# Altium PCB FABLAB_BOT_01.PcbDoc
Units mm, origin at the board's own origin, x right, y up, seen from the top; angles counter-clockwise.
Board outline 48 x 12 mm, 2 copper layers (Top Layer, Bottom Layer), stack 1.971 mm thick; 4 components, 4 nets, 20 pads, 0 vias.
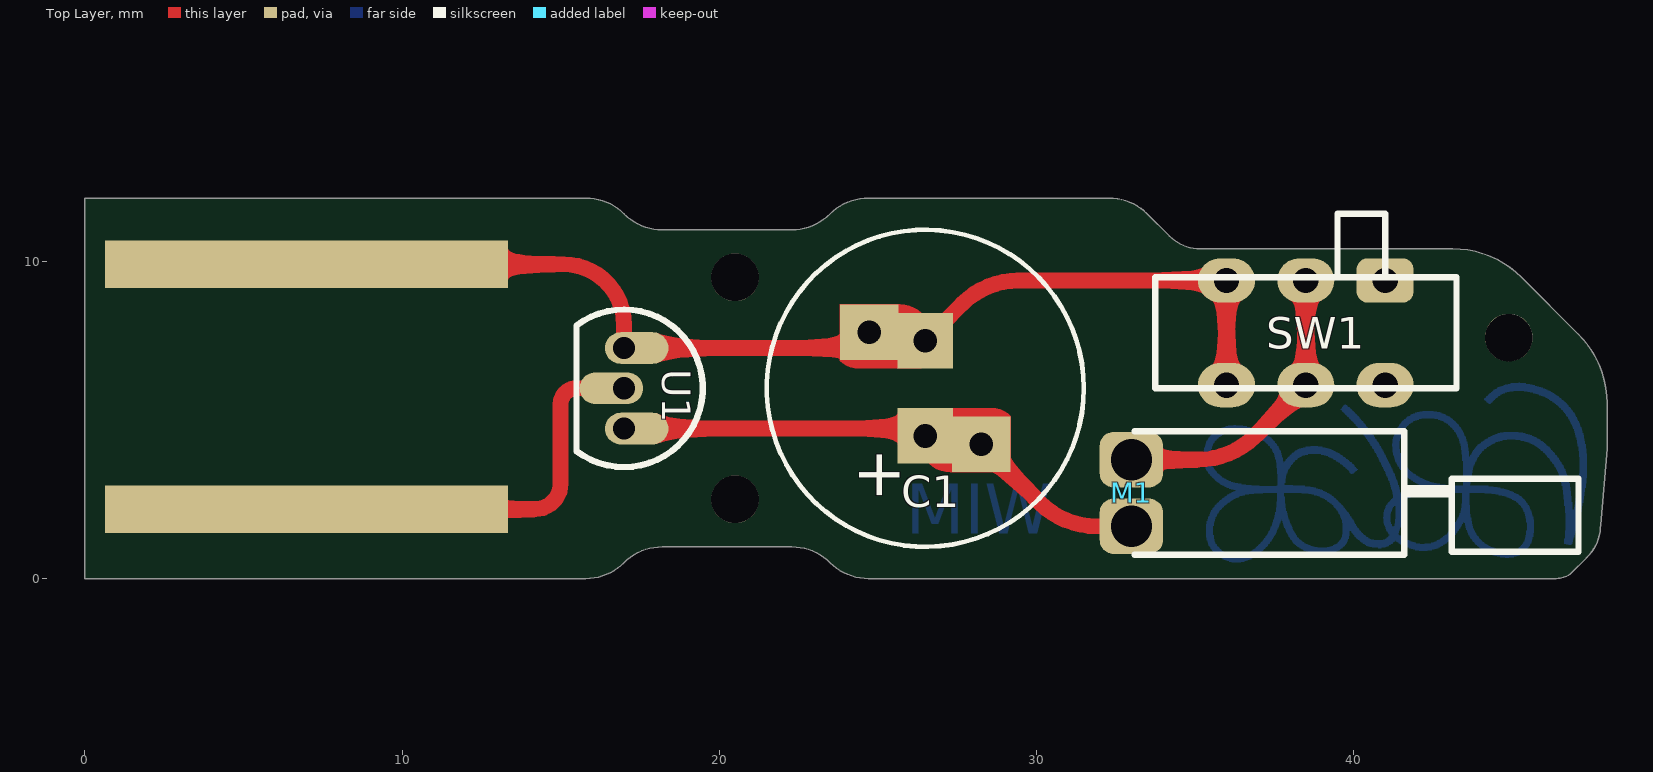
[diagram p0: Top Layer view]
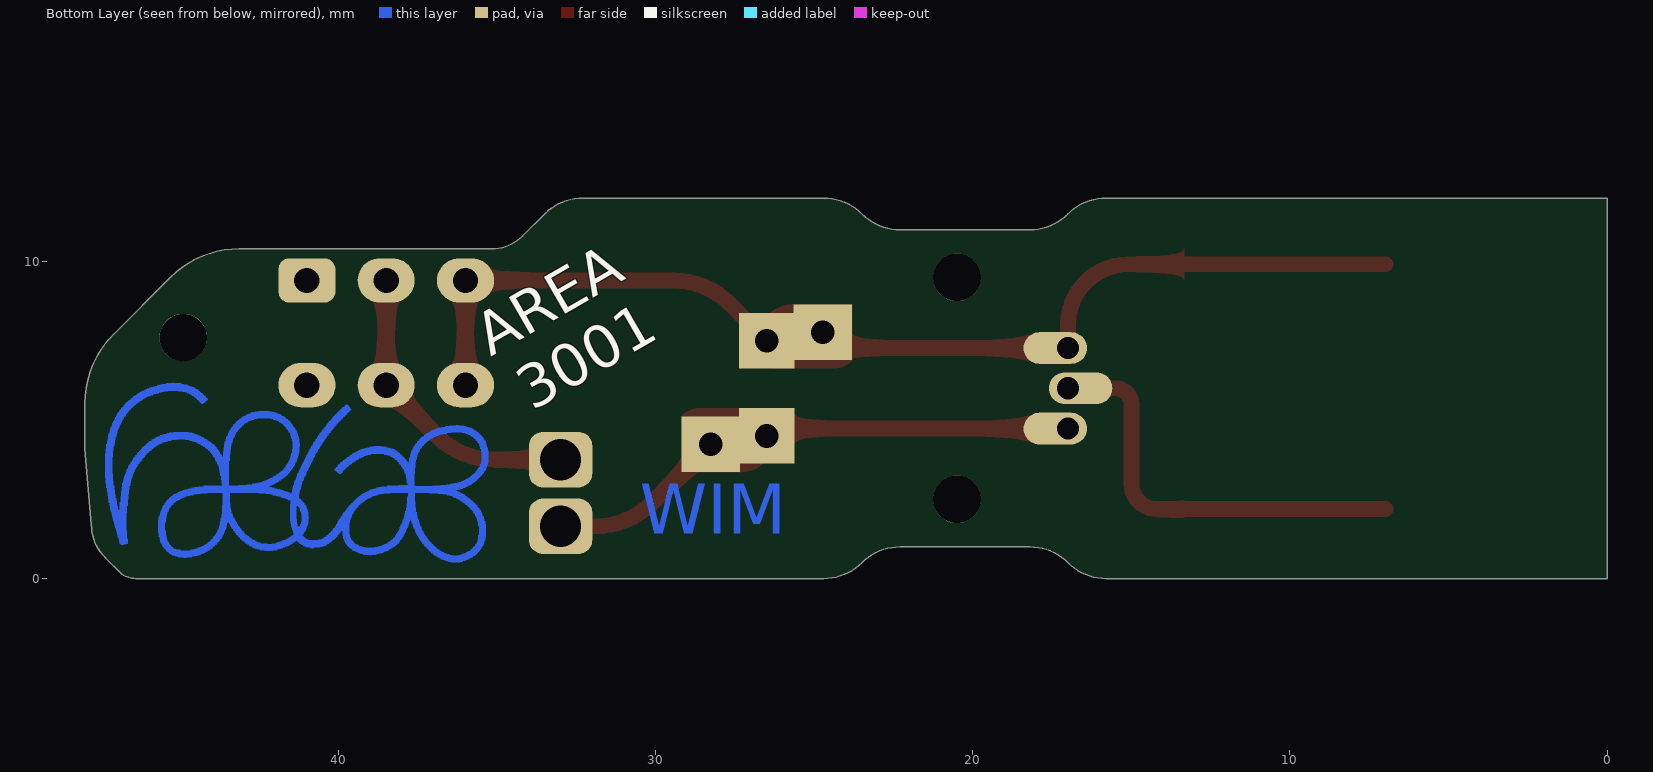
[diagram p1: Bottom Layer view, seen from below]

## Layer stack, top to bottom
Top Solder: solder mask 0.0102, Solder Resist, Dk 3.5
Top Layer: signal copper 0.0356
Dielectric1: dielectric 1.9, FR-4, Dk 4.8
Bottom Layer: signal copper 0.0356
Bottom Solder: solder mask 0.0102, Solder Resist, Dk 3.5

## Board outline
0,0 15.793,0 ccw(c15.793,1.707) 17,0.5 cw(c18.207,-0.707) 18.207,1 22.293,1 cw(c22.293,-0.707) 23.5,0.5 ccw(c24.707,1.707) 24.707,0 46.4,0 ccw(c46.4,0.724) 46.912,0.212 47.3,0.6 47.371,0.671 ccw(c46.341,1.7) 47.797,1.7 48,4.1 48,5.53 ccw(c44.934,5.53) 47.102,7.698 45.298,9.502 ccw(c43.13,7.334) 43.13,10.4 35.166,10.4 cw(c35.166,11.766) 34.2,10.8 33.495,11.505 ccw(c32.3,10.31) 32.3,12 24.707,12 ccw(c24.707,10.293) 23.5,11.5 cw(c22.293,12.707) 22.293,11 18.207,11 cw(c18.207,12.707) 17,11.5 ccw(c15.793,10.293) 15.793,12 0,12

## Design rules (kind name [scope] priority, off if disabled: settings)
Clearance [All] p1: gap=0.254
PolygonConnect [All] p1: connectstyle=Relief reliefconductorwidth=0.254 reliefentries=4 polygonreliefangle="90 Angle" airgapwidth=0.254
RoutingVias [All] p1: holewidth=0.711 width=1.27 viastyle="Through Hole" minholewidth=0.711 minwidth=1.27 maxholewidth=0.711 maxwidth=1.27
SilkToSolderMaskClearance SilkscreenOverComponentPads [IsPad] p1: minsilkscreentomaskgap=0.254 clearancetoexposedcopper=TRUE
SolderMaskExpansion [All] p1: expansion=0.102
Width [All] p1: maxlimit=10 minlimit=0.25 preferedwidth=0.5
29 further rules are at their usual default settings.

## Components (designator, comment, footprint, x,y, rotation, side; value= is the part's Value field where it differs from the comment)
C1 "CAP_POL" C_10x20mm 26.5,6 r90 top
M1 "Vibration Motor 3,9 x 8,5mm" VBR_3.9x8.5 33,2.7 r0 top
SW1 "mini Switch 2 pole double throw" MCLSS22P 38.5,7.75 r180 top
U1 "2,5V LDO" TO-92A 17,6 r180 top

## Footprints (in the part's own frame and the unit in brackets; to place one, negate y for a bottom-side part, rotate by r counter-clockwise, add the part's x,y. Pads: shape width x height; smd on the part's side, far side on the other; paste and mask are expansions set on the pad)
C_10x20mm [mm] "Capacitor, Electrolytic, Radial; Body 10 x 20mm; 5mm pitch"
  rect 1.75x1.75 hole 0.75: 1(-1.5,0) 2(1.5,0)
  silkscreen extent -5,-5 5,5, body extent -5,-5 5,5, height 20
MCLSS22P [mm] "SWITCH, DPDT, 0.1A, 12VDC, THT"
  rrect50% 1.8x1.4 hole 0.8: 1(-2.5,-1.65)
  oval 1.8x1.4 hole 0.8: 2(-2.5,1.65) 3(0,-1.65) 4(0,1.65) 5(2.5,-1.65) 6(2.5,1.65)
  silkscreen extent -4.75,-3.75 4.75,1.75, body extent -4.75,-3.7 4.75,1.75, height 3.5
TO-92A [mm] "TO, Flat Index; 3 In-Line, Axial Leads; Body Dia. 4.5mm; Leads 0.51 x 0.48 mm (max)"
  oval 2x1 hole 0.7 copper offset -0.4,0: 1(0,-1.27) 3(0,1.27)
  oval 2x1 hole 0.7 copper offset 0.4,0: 2(0,0)
  silkscreen extent -2.48,-2.48 1.5,2.48, body extent -2.61,-2.61 1.59,2.61, height 10
VBR_3.9x8.5 [mm] "Vibration motor 3.9 x 8.5 total length 14mm"
  rrect50% 2x1.75 hole 1.3: 1(0,-1.05) 2(0,1.05)
  silkscreen extent 0.1,-1.95 14.1,1.95, body extent 0.1,-1.95 14.1,1.95, height 3.9

## Part data
C1: library part "CAP 2V7 5F 10mm", "Capacitor electrolyt"
M1: library part "Vibration Motor 3.9x8.5", "=Description"
SW1: library part "SW 2P2T micro"
U1: library part "LDO 2V5 TO-92 MCP1700-25", "=Designator"

## Free pads (board coordinates)
  rect 12.7x1.5 smd: 0(6.985,2.19) 0(6.985,9.91)
  round 1.5 hole 1.5 unplated: 0(20.5,2.5) 0(20.5,9.5) 0(44.9,7.6)
  rect 1.85x1.75 hole 0.75: 1(24.732,7.768)
  rect 1.845x1.75 hole 0.75: 1(28.268,4.232)

## Nets (pads, with @x,y where several pads share a name; then routed paths per layer and width w, separated by ;. In a path a pad name is that pad's centre, name@x,y a point inside that pad or via, vN(x,y) a via of type N, cw(c..) or ccw(c..) an arc to the next point about the centre after c; other vN are vias at no path point)
2V6: C1.1 M1.1 pad.1@28.268,4.232 U1.3 | length 17.2
  Top Layer w0.5: U1.3 27.77,4.73 28.268,4.232 30.106,2.394 ccw(c31.902,4.19) 31.902,1.65 M1.1
GND: C1.2 pad.0@6.985,9.91 pad.1@24.732,7.768 SW1.5 SW1.6 U1.1 | length 33.9
  Top Layer w0.5: pad.0@6.985,9.91 15.09,9.91 cw(c15.09,8) 17,8 U1.1 C1.2@26.27,7.27 ; C1.2@27.014,8.014 27.656,8.656 cw(c29.452,6.86) 29.452,9.4 ; 29.4,9.4 SW1.5 SW1.6
NetM1_2: M1.2 SW1.3 SW1.4 | length 9.7
  Top Layer w0.5: M1.2 35.098,3.75 ccw(c35.098,6.29) 36.894,4.494 SW1.4 SW1.3
VUSB: pad.0@6.985,2.19 U1.2 | length 13.3
  Top Layer w0.5: pad.0@6.985,2.19 14.19,2.19 ccw(c14.19,3) 15,3 15,5.5 cw(c15.5,5.5) 15.5,6 U1.2
pads on no net: SW1.1 SW1.2

## Keep-outs
Keep-Out Layer:
  text ".Layer_Name" at 305.5,-28 h3.5

## Other copper
Top Layer:
  region net 2V6: 29.2,3.35 27.289,3.35 cw(c27.289,4.289) 26.625,3.625 26.625,5.375 28.596,5.375 cw(c28.596,4.521) 29.2,5.125
  region net GND: 23.8,8.65 25.711,8.65 cw(c25.711,7.711) 26.375,8.375 26.375,6.625 24.404,6.625 cw(c24.404,7.479) 23.8,6.875
  text ".Layer_Name" at 305.5,-28 h3.5
Bottom Layer:
  region: 3789 vertices and 7 holes, not listed, extent 35.282,0.515 47.363,6.172
  text "WIM" at 30.5,0.9 h2.7
  text ".Layer_Name" at 305.5,-28 h3.5

## Silkscreen, mask and mechanical layers (free items; w line width, h text height)
Top Overlay:
  text ".Layer_Name" at 305.5,-28 h3.5
Bottom Overlay:
  text "AREA" at 34.975,6.6 h2.3 r330
  text "3001" at 33.675,4.9 h2.3 r330
  text ".Layer_Name" at 305.5,-28 h3.5
Top Paste:
  text ".Layer_Name" at 305.5,-28 h3.5
Bottom Paste:
  text ".Layer_Name" at 305.5,-28 h3.5
Top Solder:
  rectangle: 0,0 13.5,12
  text ".Layer_Name" at 305.5,-28 h3.5
Bottom Solder:
  drawing of 4 lines, arcs and shapes, not listed
  text "WIM" at 30.5,0.9 h2.7
  text ".Layer_Name" at 305.5,-28 h3.5
Drill Guide:
  text ".Layer_Name" at 305.5,-28 h3.5
3D Symbols:
  text ".Layer_Name" at 305.5,-28 h3.5
Outline:
  the board outline again, w0.2
Comments:
  text ".Layer_Name" at 305.5,-28 h3.5
Fabrication:
  text "Total board thickness is 2.0mm" at -0.1,-6.7 h1.52
  text ".Layer_Name" at 305.5,-28 h3.5
Placebound Top:
  text ".Layer_Name" at 305.5,-28 h3.5
Placebound Bottom:
  text ".Layer_Name" at 305.5,-28 h3.5
Frame:
  drawing of 15 lines, arcs and shapes, not listed
  text "Document" at 301,-13 h2
  text ".PCB_TITLE" at 302.5,-18.5 h4
  text "Layer Name" at 301,-23 h2
  text "Date" at 301,-33 h2
  text "Rev" at 341,-33 h2
  text ".Print_Date" at 304,-38.5 h3.5
  text ".PCB_REV" at 345.5,-38.5 h4
  text "Desginer" at 251,-43 h2
  text "Document" at 301,-43 h2
  text ".Pcb_File_Name_No_Path" at 302.5,-48 h1.5
  text ".PCB_ENGINEER" at 255.5,-48.5 h4
Assembly Top:
  text ".Layer_Name" at 305.5,-28 h3.5
Assembly Bottom:
  text ".Layer_Name" at 305.5,-28 h3.5
Drill Drawing:
  text ".legend" at 192,0 h4

## Dimensions
0,12 to 0,0 on Fabrication
0,0 to 48,0.6 on Fabrication

## Text inside footprints (layer, text, board x,y; h text height)
C1: Assembly Top "+" at 27.3,2.35 h1.5 r90; Top Overlay "+" at 25.7,2.4 h1.5 r90